# EAGLE board CT_schematic (EAGLE 7.6.0)

Size 100 x 80 mm. Coordinates in mm from the lower left corner, seen from the top.
Outline: 0,0 100,0 100,80 0,80 0,0
Copper layers (1*16): Top 0.035mm / dielectric 1.5mm / Bottom 0.035mm
Design rules "default": minimum track width 10mil, minimum drill 24mil, track to track 8mil, track to pad 8mil, pad to pad 8mil, via to via 8mil, smd to smd 8mil, copper to edge 40mil, drill to drill 8mil, minimum pad ring 10mil, minimum via ring 8mil, stop-mask expansion 4mil, vias tented up to drill 0mil, thermal gap 10mil

## Footprints (pad centres in the part's own frame; a part is rotated, then mirrored left to right if it is on the bottom)
C0603 = smd 0.8 x 0.8: 1 -0.762,0; 2 0.762,0
C0402 = smd 0.5 x 0.5: 1 -0.508,0; 2 0.508,0
C0805 = smd 1.2 x 1.3: 1 -1.016,0; 2 1.016,0
C1206 = smd 1.3 x 1.6: 1 -1.524,0; 2 1.524,0
L0603 = smd 0.8 x 0.8: 1 -0.762,0; 2 0.762,0
L1210 = smd 1.2 x 2.5: 1 -1.524,0; 2 1.524,0
DR1040 = smd 1.6 x 3.2: 1 -4.458,0; 2 4.458,0
R0603 = smd 0.8 x 0.8: 1 -0.762,0; 2 0.762,0
LQFP64 = smd 0.3 x 1.2: 1 -3.75,-5.75; 2 -3.25,-5.75; 3 -2.75,-5.75; 4 -2.25,-5.75; 5 -1.75,-5.75; 6 -1.25,-5.75; 7 -0.75,-5.75; 8 -0.25,-5.75; 9 0.25,-5.75; 10 0.75,-5.75; 11 1.25,-5.75; 12 1.75,-5.75; 13 2.25,-5.75; 14 2.75,-5.75; 15 3.25,-5.75; 16 3.75,-5.75; 33 3.75,5.75; 34 3.25,5.75; 35 2.75,5.75; 36 2.25,5.75; 37 1.75,5.75; 38 1.25,5.75; 39 0.75,5.75; 40 0.25,5.75; 41 -0.25,5.75; 42 -0.75,5.75; 43 -1.25,5.75; 44 -1.75,5.75; 45 -2.25,5.75; 46 -2.75,5.75; 47 -3.25,5.75; 48 -3.75,5.75 | smd 1.2 x 0.3: 17 5.75,-3.75; 18 5.75,-3.25; 19 5.75,-2.75; 20 5.75,-2.25; 21 5.75,-1.75; 22 5.75,-1.25; 23 5.75,-0.75; 24 5.75,-0.25; 25 5.75,0.25; 26 5.75,0.75; 27 5.75,1.25; 28 5.75,1.75; 29 5.75,2.25; 30 5.75,2.75; 31 5.75,3.25; 32 5.75,3.75; 49 -5.75,3.75; 50 -5.75,3.25; 51 -5.75,2.75; 52 -5.75,2.25; 53 -5.75,1.75; 54 -5.75,1.25; 55 -5.75,0.75; 56 -5.75,0.25; 57 -5.75,-0.25; 58 -5.75,-0.75; 59 -5.75,-1.25; 60 -5.75,-1.75; 61 -5.75,-2.25; 62 -5.75,-2.75; 63 -5.75,-3.25; 64 -5.75,-3.75
SOIC-8 = smd 1.6 x 0.6: 1 -2.7,1.905 | smd 1.55 x 0.6: 2 -2.7,0.635; 3 -2.7,-0.635; 4 -2.7,-1.905; 5 2.7,-1.905; 6 2.7,-0.635; 7 2.7,0.635; 8 2.7,1.905
SSOP-16 = smd 1.981 x 0.356: 1 -2.464,2.223; 2 -2.464,1.587; 3 -2.464,0.953; 4 -2.464,0.318; 5 -2.464,-0.318; 6 -2.464,-0.953; 7 -2.464,-1.587; 8 -2.464,-2.223; 9 2.464,-2.223; 10 2.464,-1.587; 11 2.464,-0.953; 12 2.464,-0.318; 13 2.464,0.318; 14 2.464,0.953; 15 2.464,1.587; 16 2.464,2.223
182-009-MALE = drill 1.194 pad 1.524 octagon: 1 -5.537,10.923; 2 -2.769,10.923; 3 0,10.923; 4 2.769,10.923; 5 5.537,10.923; 6 -4.153,8.08; 7 -1.384,8.08; 8 1.384,8.08; 9 4.153,8.08 | hole 3.048: -12.446,9.501; 12.446,9.501
TSSOP20-I = smd 0.4 x 1.35: 1 -2.925,-2.875; 2 -2.275,-2.875; 3 -1.625,-2.875; 4 -0.975,-2.875; 5 -0.325,-2.875; 6 0.325,-2.875; 7 0.975,-2.875; 8 1.625,-2.875; 9 2.275,-2.875; 10 2.925,-2.875; 11 2.925,2.875; 12 2.275,2.875; 13 1.625,2.875; 14 0.975,2.875; 15 0.325,2.875; 16 -0.325,2.875; 17 -0.975,2.875; 18 -1.625,2.875; 19 -2.275,2.875; 20 -2.925,2.875
ABLS-25.000MHZ-B2F-T = smd 5.6 x 2.8: 1 -3.81,0; 2 5.69,0
ASEK = smd 1.4 x 1: 1 -1.1,-0.8; 2 1.1,-0.8; 3 1.1,0.8; 4 -1.1,0.8
TSOT-23-5 = smd 1.3 x 0.62: 1 -1.31,0.95; 2 -1.31,0; 3 -1.31,-0.95; 4 1.31,-0.95; 5 1.31,0.95
DFN8_2X3MC = smd 0.813 x 0.305: 1 -1.398,0.75; 2 -1.398,0.25; 3 -1.398,-0.25; 4 -1.398,-0.75; 5 1.398,-0.75; 6 1.398,-0.25; 7 1.398,0.25; 8 1.398,0.75 | smd 1.753 x 1.549: 9 0,0
JST-2-SMD = smd 1 x 4.6: 1 -1,-3.7; 2 1,-3.7 | smd 1.6 x 3.4: NC1 -3.4,1.5; NC2 3.4,1.5
FCI_10118193-0001LF = smd 0.4 x 1.35: 1 -1.3,2.675; 2 -0.65,2.675; 3 0,2.675; 4 0.65,2.675; 5 1.3,2.675 | smd 1.6 x 1.4: 6 -3.2,2.45; 7 3.2,2.45 | smd 1.9 x 1.9: 8 -1.2,0; 9 1.2,0 | hole 0.5: -3.3,0; 3.3,0
SON-6 = smd 0.55 x 0.3: 1 -0.355,0.5 | smd 0.52 x 0.3: 2 -0.37,0; 3 -0.37,-0.5; 4 0.37,-0.5; 5 0.37,0; 6 0.37,0.5
SW_4-1437565-2 = smd 1.4 x 2.1: 1 -2.23,4.55; 2 -2.23,-4.55; 3 2.23,4.55; 4 2.23,-4.55
LGM67K-G1J2-24-Z = smd 0.8 x 1.4: A -2,0; C 0,0
NC7SZ125M5X = smd 1.3 x 0.7: 1 -1.3,0.95; 2 -1.3,0; 3 -1.3,-0.95; 4 1.3,-0.95; 5 1.3,0.95

## Placement (x,y rotation side)
C1  1e-07  [C0603]  -22.86,82.55 0 top  (outside the outline)
C2  1e-07  [C0603]  -26.67,82.55 0 top  (outside the outline)
C3  4.7e-06  [C0603]  -15.24,82.55 0 top  (outside the outline)
C4  1e-07  [C0603]  -30.48,82.55 0 top  (outside the outline)
C5  1e-07  [C0603]  -34.29,82.55 0 top  (outside the outline)
C6  1e-08  [C0603]  -38.1,82.55 0 top  (outside the outline)
C7  1e-06  [C0603]  -41.91,82.55 0 top  (outside the outline)
C8  1e-11  [C0402]  -15.24,87.63 0 top  (outside the outline)
C9  1e-11  [C0402]  -19.05,87.63 0 top  (outside the outline)
C10  1e-08  [C0402]  -22.86,87.63 0 top  (outside the outline)
C11  1e-06  [C0603]  -45.72,82.55 0 top  (outside the outline)
C12  1e-06  [C0603]  -49.53,82.55 0 top  (outside the outline)
C13  2.2e-07  [C0603]  -19.05,82.55 0 top  (outside the outline)
C14  1e-06  [C0603]  -53.34,82.55 0 top  (outside the outline)
C15  1e-06  [C0603]  -57.15,82.55 0 top  (outside the outline)
C16  1e-07  [C0402]  -26.67,87.63 0 top  (outside the outline)
C17  1e-07  [C0402]  -30.48,87.63 0 top  (outside the outline)
C18  1e-07  [C0402]  -34.29,87.63 0 top  (outside the outline)
C19  1e-07  [C0402]  -38.1,87.63 0 top  (outside the outline)
C20  1e-07  [C0402]  -41.91,87.63 0 top  (outside the outline)
C21  1e-07  [C0402]  -45.72,87.63 0 top  (outside the outline)
C22  1e-08  [C0402]  -49.53,87.63 0 top  (outside the outline)
C23  1e-05  [C0805]  -73.66,68.58 0 top  (outside the outline)
C24  1e-05  [C0805]  -78.74,68.58 0 top  (outside the outline)
C25  1e-07  [C0402]  -53.34,87.63 0 top  (outside the outline)
C26  1e-05  [C1206]  -55.88,69.85 0 top  (outside the outline)
C27  1e-05  [C1206]  -62.23,69.85 0 top  (outside the outline)
C28  1e-08  [C0402]  -57.15,87.63 0 top  (outside the outline)
F1  240.0  [L0603]  -60.96,82.55 0 top  (outside the outline)
I1  1e-05  [L1210]  -49.53,69.85 0 top  (outside the outline)
I2  2.5e-06  [DR1040]  -53.34,49.53 0 top  (outside the outline)
R2  1000.0  [R0603]  -64.77,82.55 0 top  (outside the outline)
R4  4700.0  [R0603]  -68.58,82.55 0 top  (outside the outline)
R5  10000.0  [R0603]  -48.26,77.47 0 top  (outside the outline)
R6  10000.0  [R0603]  -53.34,77.47 0 top  (outside the outline)
R7  10000.0  [R0603]  -58.42,77.47 0 top  (outside the outline)
R8  10000.0  [R0603]  -63.5,77.47 0 top  (outside the outline)
R9  100000.0  [R0603]  -27.94,77.47 0 top  (outside the outline)
R10  220000.0  [R0603]  -33.02,77.47 0 top  (outside the outline)
R11  1000000.0  [R0603]  -22.86,77.47 0 top  (outside the outline)
R12  10000.0  [R0603]  -68.58,77.47 0 top  (outside the outline)
R13  10000.0  [R0603]  -73.66,77.47 0 top  (outside the outline)
R14  9100.0  [R0603]  -72.39,82.55 0 top  (outside the outline)
R15  680000.0  [R0603]  -38.1,77.47 0 top  (outside the outline)
R16  120000.0  [R0603]  -43.18,77.47 0 top  (outside the outline)
R17  2000.0  [R0603]  -76.2,82.55 0 top  (outside the outline)
R18  10000.0  [R0603]  -78.74,77.47 0 top  (outside the outline)
U1  STM32F030R8T6  [LQFP64]  -63.5,29.21 0 top  (outside the outline)
U2  AT25640B-SSHL-T  [SOIC-8]  -44.45,60.96 0 top  (outside the outline)
U3  LTC2804CGN-1#PBF  [SSOP-16]  -29.21,60.96 0 top  (outside the outline)
U4  182-009-113R531  [182-009-MALE]  -36.83,6.35 0 top  (outside the outline)
U5  SP3203ECY-L/TR  [TSSOP20-I]  -43.18,49.53 0 top  (outside the outline)
U6  182-009-113R531  [182-009-MALE]  -36.83,27.94 0 top  (outside the outline)
U7  ABLS-25.000MHZ-B2F-T  [ABLS-25.000MHZ-B2F-T]  -26.67,71.12 0 top  (outside the outline)
U8  ASEK-32.768KHz-ECST  [ASEK]  -76.2,59.69 0 top  (outside the outline)
U9  ltc3406es5  [TSOT-23-5]  -15.24,77.47 0 top  (outside the outline)
U10  MCP73831T-2ACI/MC  [DFN8_2X3MC]  -66.04,86.36 0 top  (outside the outline)
U11  S2B-PH-SM4-TB(LF)(SN)  [JST-2-SMD]  -68.58,50.8 0 top  (outside the outline)
U12  10118193-0001LF  [FCI_10118193-0001LF]  -54.61,59.69 0 top  (outside the outline)
U13  TPS3895ADRYR  [SON-6]  -59.69,86.36 0 top  (outside the outline)
U14  4-1437565-2  [SW_4-1437565-2]  -27.94,49.53 0 top  (outside the outline)
U15  Q65110A2395  [LGM67K-G1J2-24-Z]  -38.1,69.85 0 top  (outside the outline)
U16  nc7sz125m5x  [NC7SZ125M5X]  -67.31,68.58 0 top  (outside the outline)

## Library data of the parts
C1-C28 F1 I1 I2 R2 R4-R18 U1-U16 = circuit_tree

## Nets
CLK_CRYSTAL_U1_5: C8.1 U1.5 U7.1
CLK_CRYSTAL_U1_6: C9.1 U1.6 U7.2
CLK_U1_3: U1.3 U8.3
GND: C1.2 C2.2 C3.2 C4.2 C5.2 C6.2 C7.2 C8.2 C9.2 C10.2 C11.2 C12.2 C14.2 C15.2 C16.2 C17.2 C20.2 C21.2 C22.2 C23.2 C24.1 C24.2 C25.2 C26.2 C27.2 C28.2 R2.2 R5.2 R10.2 R14.2 R16.2 R17.2 U1.12 U1.31 U1.63 U2.4 U3.8 U4.5 U5.18 U6.5 U8.2 U9.2 U10.6 U10.9 U11.2 U12.5 U12.6 U12.7 U12.8 U12.9 U13.2 U15.C U16.1 U16.3
INPUT_USBPOWER_5V: C26.1 R18.2 U10.1 U10.2 U12.1
NET_U1_7: R4.1 U1.7 U16.4
NET_U1_13: C6.1 C7.1 F1.1 U1.13
NET_U1_60: R5.1 U1.60
NET_U1_61: U15.A
NET_U1_62: U14.3 U14.4
NET_U2_3: R6.1 U2.3
NET_U2_7: R8.1 U2.7
NET_U3_6: C11.1 U3.6
NET_U3_7: C13.1 I1.2 U3.7
NET_U3_9: C12.1 U3.9
NET_U3_10: C13.2 U3.10
NET_U3_11: R9.1 U3.11
NET_U4_2: U3.1 U4.2
NET_U4_3: U3.3 U4.3
NET_U4_7: U3.2 U4.7
NET_U4_8: U3.4 U4.8
NET_U5_1: C18.1 U5.1
NET_U5_2: C20.1 U5.2
NET_U5_3: C18.2 U5.3
NET_U5_4: C19.1 U5.4
NET_U5_5: C19.2 U5.5
NET_U5_6: C21.1 U5.6
NET_U5_20: U5.20
NET_U6_2: U5.14 U6.2
NET_U6_3: U5.17 U6.3
NET_U6_7: U5.13 U6.7
NET_U6_8: U5.16 U6.8
NET_U9_1: U9.1
NET_U9_3: I2.1 U9.3
NET_U9_5: R10.1 R11.1 U9.5
NET_U9_ATNET_3: I2.2 R11.2
NET_U10_5: R18.1 U10.5
NET_U10_8: R17.1 U10.8
NET_U13_1: R13.1 R14.1 U13.1
NET_U13_3: R15.2 R16.1 U13.3
NET_U13_4: R12.1 U13.4 U16.2
NET_U14_1: R2.1 U14.1 U14.2
PROC_SPI1_MISO: U1.22 U2.2
PROC_SPI1_MOSI: U1.23 U2.5
PROC_SPI1_NSS: R7.1 U1.20 U2.1
PROC_SPI1_SCK: U1.21 U2.6
PROC_USART1_CTS: U1.44 U5.8
PROC_USART1_RTS: U1.45 U5.10
PROC_USART1_RX: U1.43 U5.11
PROC_USART1_TX: U1.42 U5.7
PROC_USART2_CTS: U1.14 U3.13
PROC_USART2_RTS: U1.15 U3.15
PROC_USART2_RX: U1.17 U3.16
PROC_USART2_TX: U1.16 U3.14
VCC_S1_3V7: C23.1 C27.1 U9.4 U10.3 U10.4 U11.1
VCC_TIER1_3V3: C1.1 C2.1 C3.1 C4.1 C5.1 C10.1 C14.1 C15.1 C16.1 C17.1 C22.1 C24.2 C25.1 C28.1 F1.2 I1.1 I2.2 R4.2 R6.2 R7.2 R8.2 R9.2 R11.2 R12.2 R13.2 R15.1 U1.1 U1.32 U1.64 U2.8 U3.5 U3.12 U5.12 U5.19 U8.4 U13.6 U16.5

## Tracks (layer width: path | path; a pad name or v marks a point on that pad's centre or on a via)
CLK_CRYSTAL_U1_5  (2 unrouted)
CLK_CRYSTAL_U1_6  (2 unrouted)
CLK_U1_3  (1 unrouted)
GND  (53 unrouted)
INPUT_USBPOWER_5V  (4 unrouted)
NET_U1_7  (2 unrouted)
NET_U1_13  (3 unrouted)
NET_U1_60  (1 unrouted)
NET_U1_62  (1 unrouted)
NET_U2_3  (1 unrouted)
NET_U2_7  (1 unrouted)
NET_U3_6  (1 unrouted)
NET_U3_7  (2 unrouted)
NET_U3_9  (1 unrouted)
NET_U3_10  (1 unrouted)
NET_U3_11  (1 unrouted)
NET_U4_2  (1 unrouted)
NET_U4_3  (1 unrouted)
NET_U4_7  (1 unrouted)
NET_U4_8  (1 unrouted)
NET_U5_1  (1 unrouted)
NET_U5_2  (1 unrouted)
NET_U5_3  (1 unrouted)
NET_U5_4  (1 unrouted)
NET_U5_5  (1 unrouted)
NET_U5_6  (1 unrouted)
NET_U6_2  (1 unrouted)
NET_U6_3  (1 unrouted)
NET_U6_7  (1 unrouted)
NET_U6_8  (1 unrouted)
NET_U9_3  (1 unrouted)
NET_U9_5  (2 unrouted)
NET_U9_ATNET_3  (1 unrouted)
NET_U10_5  (1 unrouted)
NET_U10_8  (1 unrouted)
NET_U13_1  (2 unrouted)
NET_U13_3  (2 unrouted)
NET_U13_4  (2 unrouted)
NET_U14_1  (2 unrouted)
PROC_SPI1_MISO  (1 unrouted)
PROC_SPI1_MOSI  (1 unrouted)
PROC_SPI1_NSS  (2 unrouted)
PROC_SPI1_SCK  (1 unrouted)
PROC_USART1_CTS  (1 unrouted)
PROC_USART1_RTS  (1 unrouted)
PROC_USART1_RX  (1 unrouted)
PROC_USART1_TX  (1 unrouted)
PROC_USART2_CTS  (1 unrouted)
PROC_USART2_RTS  (1 unrouted)
PROC_USART2_RX  (1 unrouted)
PROC_USART2_TX  (1 unrouted)
VCC_S1_3V7  (5 unrouted)
VCC_TIER1_3V3  (36 unrouted)